# Altium PCB PCB2.0.PcbDoc
Units mil, origin at the board's own origin, x right, y up, seen from the top; angles counter-clockwise.
Board outline 1780 x 1290 mil, 2 copper layers (Top Layer, Bottom Layer); 31 components, 36 nets, 125 pads, 32 vias.
Unrouted connection lines stored in the file: 1.
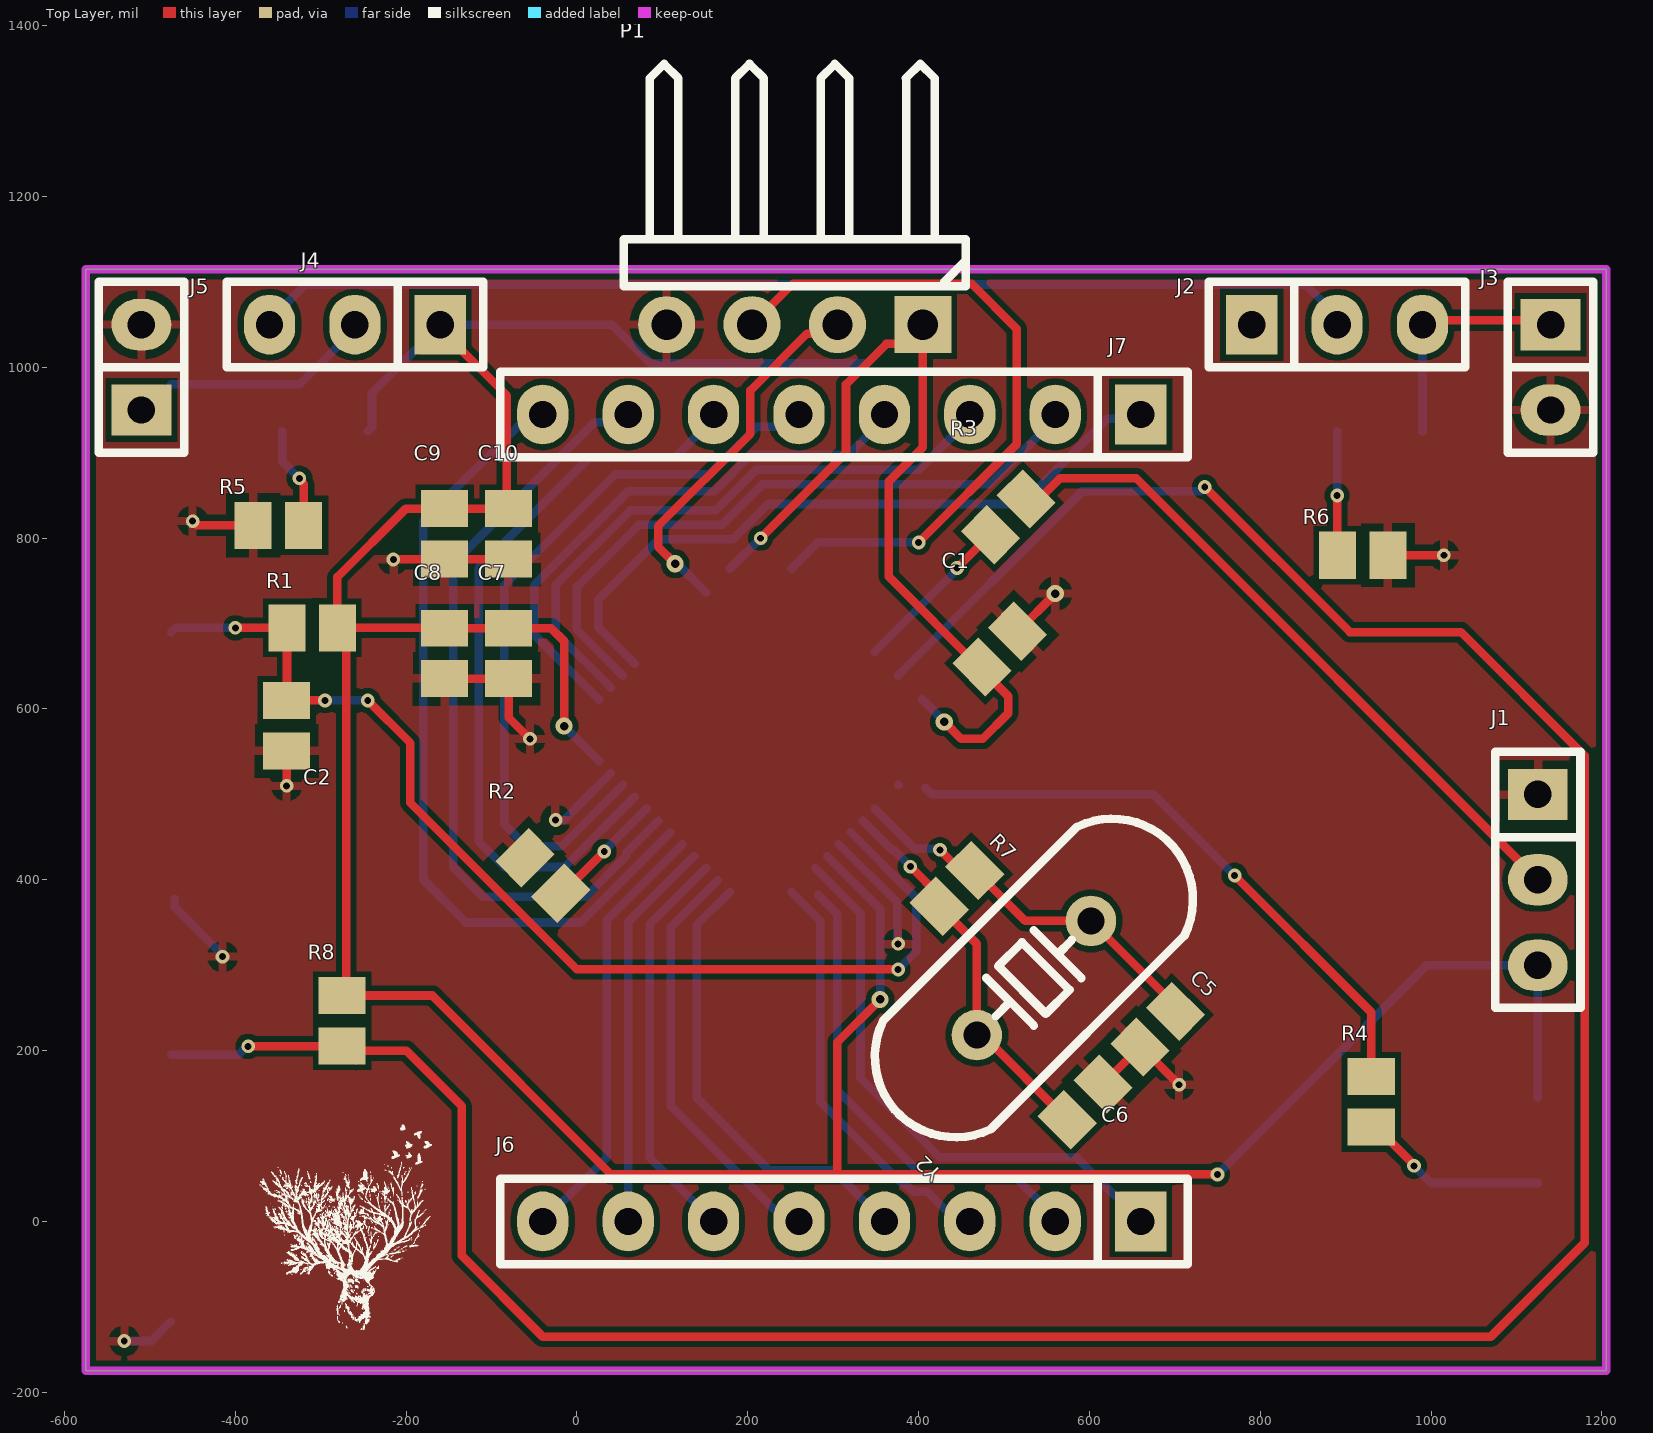
[diagram p0: Top Layer view]
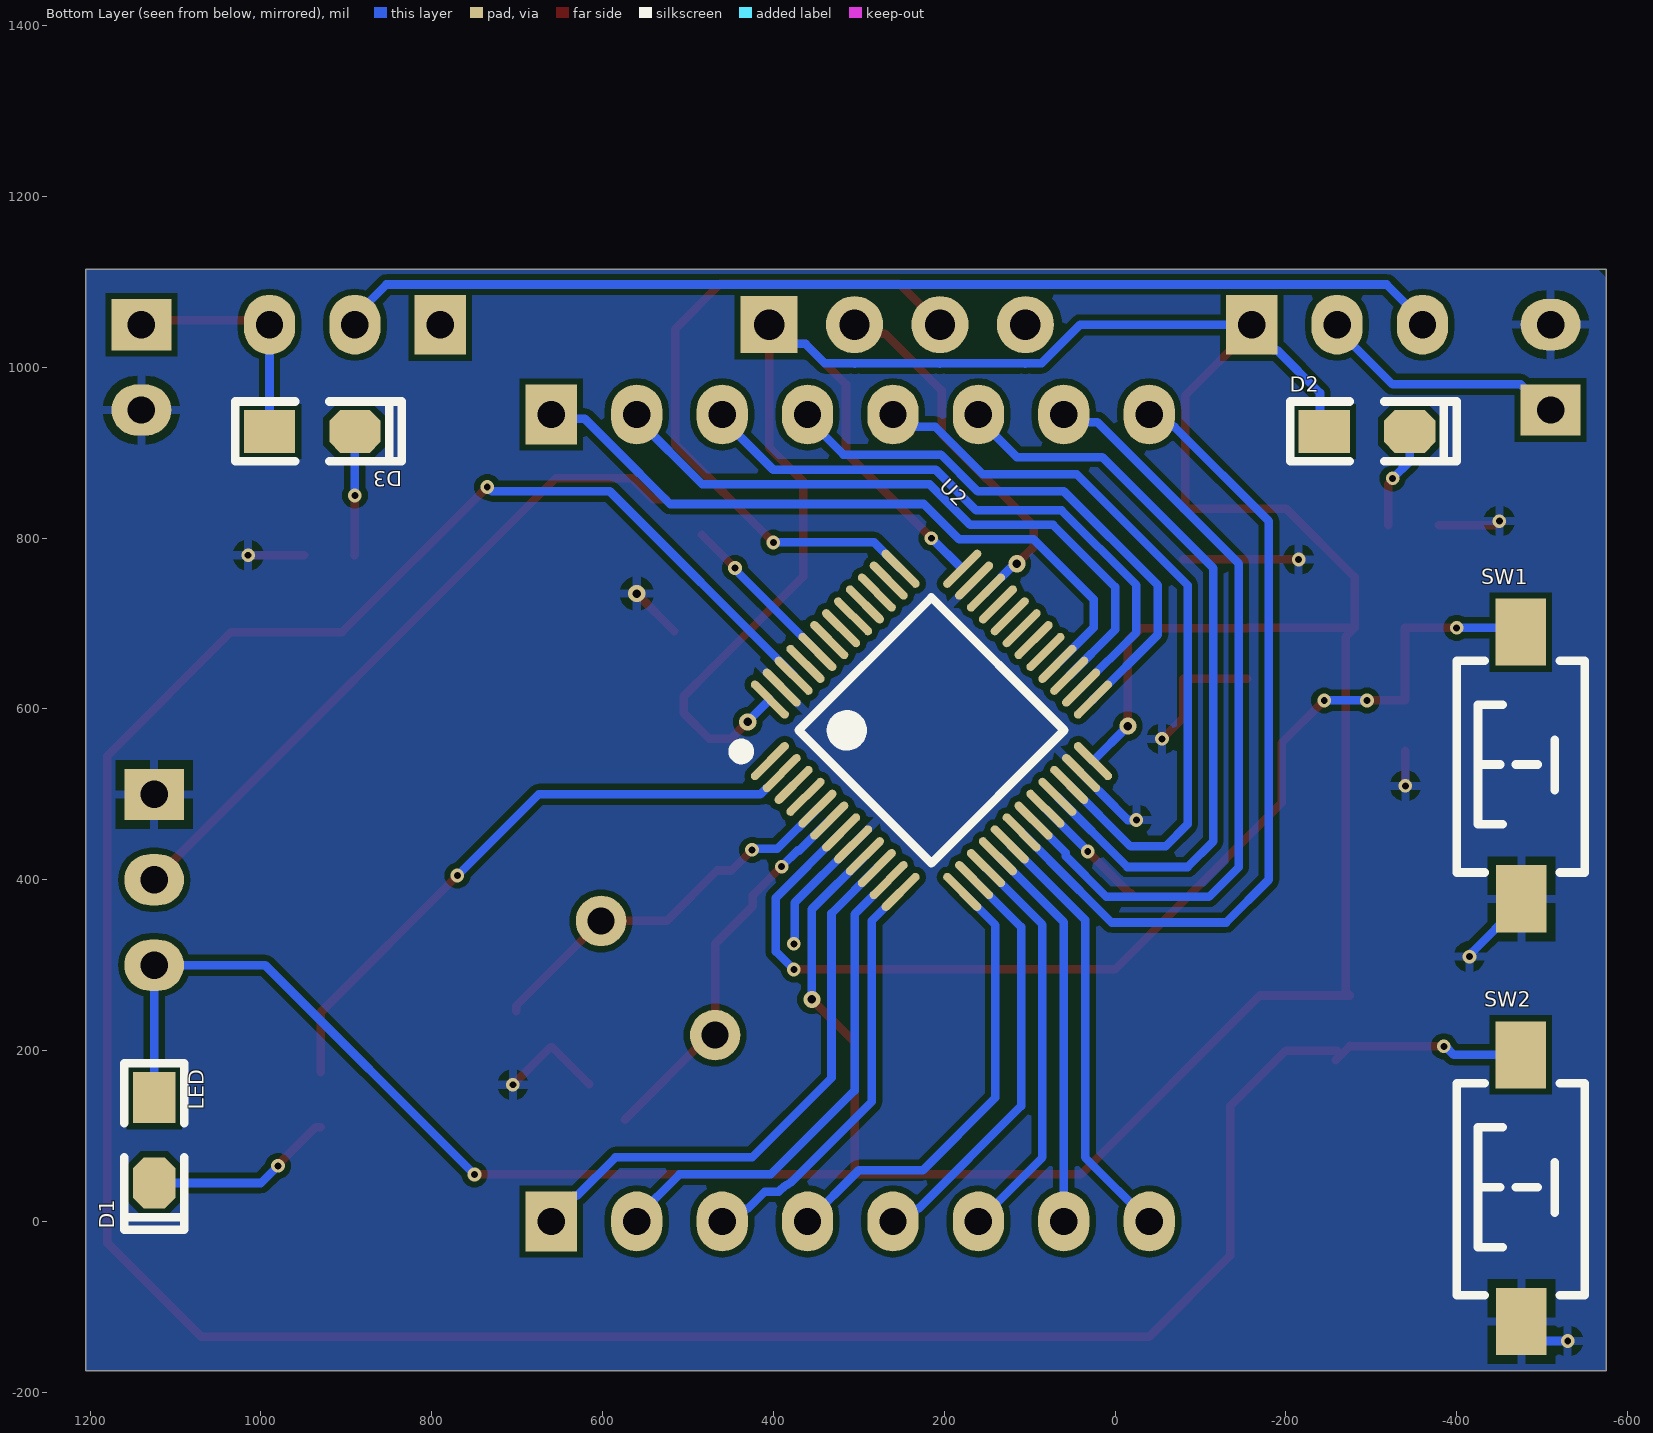
[diagram p1: Bottom Layer view, seen from below]

## Layer stack, top to bottom
Top Solder: solder mask 0.4, Solder Resist, Dk 3.5
Top Layer: signal copper 1.4
Dielectric 1: dielectric 12.6, FR-4, Dk 4.8
Bottom Layer: signal copper 1.4
Bottom Solder: solder mask 0.4, Solder Resist, Dk 3.5

## Board outline
-575,-175 -575,1115 1205,1115 1205,-175

## Design rules (kind name [scope] priority, off if disabled: settings)
Clearance [All] p1: gap=7 ignorepadtopadclearanceinfootprint=FALSE
ComponentClearance [All] p1: gap=0 collisioncheckmode=3 verticalgap=0 showdistances=TRUE
HoleToHoleClearance [All] p1: gap=2 allowstackedmicrovias=TRUE
MinimumSolderMaskSliver [All] p1: minsoldermaskwidth=0
PlaneConnect [All] p1: planeconnectstyle=Direct reliefexpansion=20 reliefentries=4 reliefconductorwidth=10 reliefairgap=10
PolygonConnect [All] p1: connectstyle=Relief reliefconductorwidth=10 reliefentries=4 polygonreliefangle="90 Angle" airgapwidth=10
RoutingVias [All] p1: holewidth=10 width=20 viastyle="Through Hole" minholewidth=1 minwidth=12 maxholewidth=13 maxwidth=27
SilkToSilkClearance [All] p1: silktosilkclearance=0
SilkToSolderMaskClearance [IsPad] p1: minsilkscreentomaskgap=0 clearancetoexposedcopper=TRUE
SolderMaskExpansion [All] p1: expansion=4 istentingtop=FALSE
Width [All] p1: maxlimit=30 minlimit=10 preferedwidth=10 minimp=50.000000 maximp=50.000000 favimp=50.000000
24 further rules are at their usual default settings.

## Classes and differential pairs
component class stm32最小系统: C1 C2 C5 C6 C7 C8 C9 C10 D1 D2 D3 J1 J2 J3 J4 J5 J6 J7 P1 R2 SW1 SW2 U2 Y2

## Components (designator, comment, footprint, x,y, rotation, side; value= is the part's Value field where it differs from the comment)
C1 "105 C0603" C0805 495,670 r225 top value=104
C2 "105 C0603" C0805 -340,580.47 r90 top value=104
C5 "22P,0603" C0805 680,225 r225 top value=104
C6 "22P,0603" C0805 595,140 r45 top value=104
C7 "105 C0603" C0805 -80,665 r90 top value=104
C8 "105 C0603" C0805 -155,665 r90 top value=104
C9 "105 C0603" C0805 -155,805 r90 top value=104
C10 "105 C0603" C0805 -80,805 r90 top value=104
D1 "LED" "LED 0805G" 1125,95 r270 bottom
D2 "LED" "LED 0805G" -295,925 r180 bottom
D3 "LED" "LED 0805G" 940,925 r180 bottom
J1 "Pin HDR1X3" "Pin HDR1X3/2.54mm-S" 1125,500 r0 top
J2 "充电开关" "Pin HDR1X3/2.54mm-S" 790,1050 r90 top
J3 "充电电源" Fe-HDR1X2/2.54-S 1140,1050 r270 top
J4 "开关" "Pin HDR1X3/2.54mm-S" -160,1050 r270 top
J5 "电池" Fe-HDR1X2/2.54-S -510,950 r90 top
J6 "Female HDR1X8" Fe-HDR1X8/2.54-S 660,0 r270 top locked
J7 "Female HDR1X8" Fe-HDR1X8/2.54-S 660,944.88 r270 top locked
P1 "SWD" HDR-1X4_H 405,1050 r180 top
R1 "10K R0603" C0805 -310,695 r0 top
R2 "10K R0603" C0805 -40,405 r315 top
R3 "10K R0603" C0805 505,825 r45 top
R4 "10K R0603" C0805 930,140 r90 top
R5 "10K R0603" C0805 -349.53,815 r180 top
R6 "10K R0603" C0805 920,780 r0 top
R7 "1M0603" C0805 445,390 r45 top
R8 "10K R0603" C0805 -275,235 r90 top
SW1 "SW-PB_V" "TSW SMD-3*6*2.5" -475,535 r90 bottom
SW2 "SW-PB_V" "TSW SMD-3*6*2.5" -475,40 r90 bottom
U2 "stm32f103c8t6_48pin" "TQFP48 7x7_L" 215,575 r225 bottom
Y2 "8M" "XTAL-49S DIP" 535,285 r45 top

## Footprints (in the part's own frame and the unit in brackets; to place one, negate y for a bottom-side part, rotate by r counter-clockwise, add the part's x,y. Pads: shape width x height; smd on the part's side, far side on the other; paste and mask are expansions set on the pad)
C0805 [mm] "Chip Capacitor, Body 2.0x1.3mm, IPC High Density"
  rect 1.1x1.4 smd: 1(-0.75,0) 2(0.75,0)
  body extent -1.1,-0.72 1.1,0.72, height 1.4
Fe-HDR1X2/2.54-S [mil] "Connector; Header; 2x2 Position"
  rect 60x70 hole 32: 1(0,0)
  oval 60x70 hole 32: 2(100,0)
  silkscreen extent -50,-50 150,50, body extent -55,-48 155,50, height 335
Fe-HDR1X8/2.54-S [mil]
  rect 70x60 hole 32: 1(0,0)
  oval 70x60 hole 32: 2(0,-100) 3(0,-200) 4(0,-300) 5(0,-400) 6(0,-500) 7(0,-600) 8(0,-700)
  silkscreen extent -50,-750 50,55, body extent -49,-755 49,55, height 126
HDR-1X4_H [mm] "弯脚排针，4脚"
  rect 1.7x1.7 hole 0.9: 1(0,0)
  round 1.7 hole 0.9: 2(2.54,0) 3(5.08,0) 4(7.62,0)
  silkscreen extent -1.27,-7.76 8.89,-1.14, body extent -1.27,-7.77 8.89,1.27, height 4.85
"LED 0805G" [mil] "绿色0805LED"
  rect 60x50 smd: 1(-50,0)
  oct 60x50 smd: 2(50,0)
  silkscreen extent -90,-35 105,35, body extent -39,-25 39,25, height 32
"Pin HDR1X3/2.54mm-S" [mil]
  rect 70x60 hole 32: 1(0,0)
  oval 70x60 hole 32: 2(0,-100) 3(0,-200)
  silkscreen extent -50,-250 50,50, body extent -50,-250 50,50, height 336
"TQFP48 7x7_L" [mm] "48脚，体宽：7x7mm, 脚距：0.5mm"
  oval 0.25x1.5 smd: 1(-2.75,-4.046) 2(-2.25,-4.046) 3(-1.75,-4.046) 4(-1.25,-4.046) 5(-0.75,-4.046) 6(-0.25,-4.046) 7(0.25,-4.046) 8(0.75,-4.046) 9(1.25,-4.046) 10(1.75,-4.046) 11(2.25,-4.046) 12(2.75,-4.046) 25(2.75,4.046) 26(2.25,4.046) 27(1.75,4.046) 28(1.25,4.046) 29(0.75,4.046) 30(0.25,4.046) 31(-0.25,4.046) 32(-0.75,4.046) 33(-1.25,4.046) 34(-1.75,4.046) 35(-2.25,4.046) 36(-2.75,4.046)
  oval 1.5x0.25 smd: 13(4.046,-2.75) 14(4.046,-2.25) 15(4.046,-1.75) 16(4.046,-1.25) 17(4.046,-0.75) 18(4.046,-0.25) 19(4.046,0.25) 20(4.046,0.75) 21(4.046,1.25) 22(4.046,1.75) 23(4.046,2.25) 24(4.046,2.75) 37(-4.046,2.75) 38(-4.046,2.25) 39(-4.046,1.75) 40(-4.046,1.25) 41(-4.046,0.75) 42(-4.046,0.25) 43(-4.046,-0.25) 44(-4.046,-0.75) 45(-4.046,-1.25) 46(-4.046,-1.75) 47(-4.046,-2.25) 48(-4.046,-2.75)
  silkscreen extent -3.68,-4.57 2.79,2.79, body extent -4.5,-4.5 4.5,4.5, height 1.05
"TSW SMD-3*6*2.5" [mm] "3*6*2.5mm"
  rect 2x1.5 smd: 1(-3.996,-0.02) 2(3.937,0)
  silkscreen extent -3.21,-1.9 3.09,1.9, body extent -4,-1.88 4,1.62, height 2.59
"XTAL-49S DIP" [mm]
  round 1.5 hole 0.8: 1(-2.4,0) 2(2.4,0)
  silkscreen extent -5.7,-2.28 5.7,2.28, body extent -5.68,-2.35 5.68,2.3, height 3.5

## Part data
C1 C2 C7 C8 C9 C10: library part Cap, LatestRevisionDate=17-Jul-2002, LatestRevisionNote="Re-released for DXP Platform.", Published=8-Jun-2000, Publisher="Altium Limited"
C5 C6: library part Cap, "Capacitor", LatestRevisionDate=17-Jul-2002, LatestRevisionNote="Re-released for DXP Platform.", Published=8-Jun-2000, Publisher="Altium Limited"
J2 J4: library part "Pin HDR1X3"
J3 J5: library part "Female HDR1X2"
P1: library part "Header 4", "Header, 4-Pin", LatestRevisionDate=17-Jul-2002, LatestRevisionNote="Re-released for DXP Platform.", Publisher="Altium Limited"
R1 R2 R3 R4 R5 R6 R8: library part Res2, LatestRevisionDate=17-Jul-2002, LatestRevisionNote="Re-released for DXP Platform.", Published=8-Jun-2000, Publisher="Altium Limited"
R7: library part Res2, "Resistor", LatestRevisionDate=17-Jul-2002, LatestRevisionNote="Re-released for DXP Platform.", Published=8-Jun-2000, Publisher="Altium Limited"
Y2: library part XTAL, "Crystal Oscillator", LatestRevisionDate=17-Jul-2002, LatestRevisionNote="Re-released for DXP Platform.", Published=8-Jun-2000, Publisher="Altium Limited"

## Via types
v1: diameter 16, hole 8, Top Layer to Bottom Layer, 27 vias
v2: diameter 20, hole 10, Top Layer to Bottom Layer, 5 vias

## Nets (pads, with @x,y where several pads share a name; then routed paths per layer and width w, separated by ;. In a path a pad name is that pad's centre, name@x,y a point inside that pad or via, vN(x,y) a via of type N, cw(c..) or ccw(c..) an arc to the next point about the centre after c; other vN are vias at no path point)
BOOT0: R3.1 U2.44 | length 193.5
  Top Layer w10: v1(445,765) R3.1
  Bottom Layer w10: U2.44 443.85,762.09 443.85,763.85 v1(445,765)
BOOT1: R2.2 U2.20 | length 141.9
  Top Layer w10: R2.2 -17.19,384.12 v1(31.84,433.16)
  Bottom Layer w10: v1(31.84,433.16) 31.84,433.6 U2.20
GND: C1.1 C2.1 C5.2 C6.2 C7.1 C8.1 C9.1 C10.1 J1.1 J3.2 J5.2 P1.4 R2.1 R5.2 R6.2 SW1.1 SW2.1 U2.8 U2.23 U2.35 U2.47 | length 1045.8
  Top Layer w10: v1(-450,820) -445,815 R5.2 ; v1(-340,510) C2.1 ; v1(-215,775) -214.53,775.47 C9.1 C10.1 ; C8.1 C7.1 -80,590 v1(-55,565) ; C1.1 v2(560,735) ; C6.2 C5.2 660.88,204.12 v1(705,160) ; R6.2 v1(1015,780)
  Bottom Layer w10: v1(-530,-140) -498.47,-140 SW2.1 ; SW1.1@-470.79,377.69 -470.79,367.84 -417.94,315 -417.94,314.57 -415,311.62 v1(-415,310) ; v1(-25,470) -15,470 0,485 -0.27,485 U2.23 ; U2.8 375,373.24 375,326 v1(376,325)
NetD1_2: D1.2 R4.1 | length 222.9
  Top Layer w10: R4.1 935.91,110.47 980,66.38 v1(980,65)
  Bottom Layer w10: v1(980,65) 1000,45 D1.2
NetD2_2: D2.2 R5.1 | length 120.4
  Top Layer w10: v1(-325,870) -325,868.38 -320,863.38 R5.1
  Bottom Layer w10: D2.2 -345,890 v1(-325,870)
NetD3_1: D3.1 J2.3 J3.1 | length 277.1
  Top Layer w10: J2.3@990,1055 1135,1055 J3.1
  Bottom Layer w10: D3.1 J2.3
NetD3_2: D3.2 R6.1 | length 145.2
  Top Layer w10: v1(890,850) 890,780.47 R6.1
  Bottom Layer w10: v1(890,850) D3.2
NetJ1_2: J1.2 R3.2 | length 803.8
  Top Layer w10: R3.2 541.19,845.88 565.31,870 655,870 J1.2
NetJ2_2: J2.2 J4.3 | length 1292.7
  Bottom Layer w10: J4.3 -360,1055 -318,1097 853,1097 890,1060 J2.2@890,1055
NetJ4_2: J4.2 J5.1 | length 294.4
  Bottom Layer w10: J5.1 -505,950 -475,980 -325,980 -260,1045 J4.2
OSCIN: C5.1 R7.2 U2.5 Y2.2 | length 454.7
  Top Layer w10: v1(425,435) 449.12,410.88 R7.2 524.95,351.81 Y2.2 700.88,252.75 C5.1
  Bottom Layer w10: U2.5 395.61,436.15 423.85,436.15 v1(425,435)
OSCOUT: C6.1 R7.1 U2.6 Y2.1 | length 454.5
  Top Layer w10: v1(390.39,415.39) 424.12,381.66 R7.1 468.19,325.05 Y2.1 475.05,218.19 C6.1
  Bottom Layer w10: U2.6 334.71,469.32 369.72,434.31 371.47,434.31 v1(390.39,415.39)
PA0: J6.1 U2.10 | length 668.1
  Bottom Layer w10: U2.10 332,360.56 332,168 425,75 585,75 630,30 635,30 660,5 J6.1
PA1: J6.2 U2.11 | length 559.9
  Bottom Layer w10: U2.11@282.34,382.38 305,359.73 305,153.28 403.28,55 510,55 560,5 J6.2
PA2: J6.3 U2.12 | length 492.1
  Bottom Layer w10: U2.12 285,351.89 285,140 350.2,74.8 379.39,45.61 cw(c360,5) 391.82,36.82 393.64,35 397.75,35 410,35 430.43,14.57 445.43,14.57 J6.3
PA3: J6.4 U2.13 | length 537
  Bottom Layer w10: U2.13 140,346.89 140,145 225,60 300,60 J6.4
PA4: J6.5 U2.14 | length 493.4
  Bottom Layer w10: U2.14 110,344.73 110,135 230.43,14.57 245.43,14.57 J6.5
PA5: J6.6 U2.15 | length 472.1
  Bottom Layer w10: U2.15 85,347.56 85,75 J6.6
PA6: J6.7 U2.16 | length 459.5
  Bottom Layer w10: J6.7 60,350.4 U2.16
PA7: J6.8 U2.17 | length 509.1
  Bottom Layer w10: J6.8 35,75 35,353.24 U2.17
PB0: J7.8 U2.18 | length 965.5
  Bottom Layer w10: J7.8 -54.57,930.32 -69.69,930.32 -180,820 -180,400 -130,350 4.04,350 77,422.96 77,423.08 U2.18
PB1: J7.7 U2.19 | length 926.6
  Bottom Layer w10: J7.7 50.98,935.86 20.86,935.86 -145,770 -145,415 -110,380 10,380 57.5,427.5 57.5,431.42 U2.19
PB9: R8.1 SW2.2 U2.46 | length 3550.8
  Top Layer w10: v1(-385,205) -275.47,205 R8.1 R8.1@-258.35,188.82 ; R8.1@-260,200 -200,200 -135,135 -135,-40 -40,-135 1070,-135 1180,-25 1180,545 1035,690 905,690 v1(735,860)
  Bottom Layer w10: SW2.2 -396.62,195 -386.62,205 v1(-385,205) ; U2.46 376.35,639.64 591.72,855 730,855 v1(735,860)
PB10: J7.6 U2.21 | length 901.5
  Bottom Layer w10: U2.21 -14.6,415 -85,415 -115,445 -115,765 15,895 115.12,895 160,939.88 J7.6
PB11: J7.5 U2.22 | length 888.4
  Bottom Layer w10: U2.22 -18.29,439.14 -59.14,439.14 -85,465 -85,745 45,875 155,875 210.31,930.32 245.43,930.32 J7.5@253.02,937.91 ; J7.5@255.52,935.41 260,939.88 J7.5
PB12: J7.4 U2.25 | length 661
  Bottom Layer w10: U2.25 -50,686.89 -50,745 60,855 160.96,855 203.84,897.88 318,897.88 360,939.88 J7.4
PB13: J7.3 U2.26 | length 717.5
  Bottom Layer w10: U2.26 -25,689.73 -25,745 62.51,832.51 162.51,832.51 210,880 400.12,880 460,939.88 J7.3
PB14: J7.2 U2.27 | length 772.9
  Bottom Layer w10: U2.27 0,692.56 0,743 72.51,815.51 169.56,815.51 217.04,863 483.12,863 560,939.88 J7.2
PB15: J7.1 U2.28 | length 817.8
  Bottom Layer w10: U2.28 25,695.4 25,728.33 95.19,798.51 182.4,798.51 223.89,840 520.93,840 590.41,909.48 620.86,939.93 655.05,939.93 J7.1
PC13: R4.2 U2.2 | length 701.6
  Top Layer w10: v1(770,405) 930,245 R4.2@930,174.53
  Bottom Layer w10: U2.2@407.67,507.71 415.39,500 675,500 v1(770,405)
PC14: U2.3 | length 0.1
  Bottom Layer w10: U2.3 U2.3@376.47,511.08
PC15: U2.4
RESET: C2.2 R1.1 SW1.2 U2.7 | length 1310.9
  Top Layer w10: v1(-400,695) R1.1 -339.53,610.47 C2.2 v1(-295,610) ; v1(-245,610) -195,560 -195,490 0,295 v1(376,295)
  Bottom Layer w10: SW1.2 -470,695 v1(-400,695) ; v1(-295,610) v1(-245,610) ; U2.7 397,379.08 397,316 v1(376,295)
SWDCLK: P1.3 U2.37 | length 811.2
  Top Layer w10: P1.3 253,1098 462,1098 515,1045 515,910 v1(400,795)
  Bottom Layer w10: U2.37 251.19,764.19 282,795 v1(400,795)
SWDIO: P1.2 U2.34 | length 439.9
  Top Layer w10: v2(115,770) 95,790 95,814.07 203,922.07 203,973 269.49,1039.49 294.49,1039.49 P1.2
  Bottom Layer w10: v2(115,770) 117.32,770 150.97,736.35 U2.34
VCC3V3: C1.2 C7.2 C8.2 C9.2 C10.2 D1.1 D2.1 J1.3 J4.1 P1.1 R1.2 R8.2 U2.9 U2.24 U2.36 U2.48 | length 5394
  Top Layer w10: J4.1 -160,1045 -82,967 -82,836.53 C10.2 C9.2 -200.47,834.53 -280.47,754.53 R1.2 ; v2(-15,580) -15,679.21 -30.32,694.53 C7.2 C8.2 -155.47,695 R1.2 ; v1(215,800) 315,900 315,980 362.39,1027.39 382.39,1027.39 P1.1 405,906.44 365,866.44 365,755 472.5,647.5 505,615 505,595 475,565 450,565 v2(430,585) ; v2(355,260) 305,210 305,55 ; v1(750,55) 305,55 ; J1.3@1120,300 J1.3 ; R1.2 -270,684.53 -270,269.53 R8.2 -169.53,264.53 40,55 305,55
  Bottom Layer w10: D2.1 -240,930 -240,970 -190,1020 -185,1020 -160,1045 J4.1 40.7,1050 82.77,1007.93 85.7,1005 98.52,1005 ccw(c105,1050) 111.48,1005 198.52,1005 ccw(c205,1050) 211.48,1005 298.52,1005 ccw(c305,1050) 311.48,1005 340,1005 362.39,1027.39 382.39,1027.39 P1.1 ; v2(-15,580) -15,579.73 U2.24 ; U2.36 214.73,800 v1(215,800) ; U2.9 355,365.4 v2(355,260) ; U2.48 430,585.27 v2(430,585) ; v1(750,55) 995,300 J1.3 D1.1
pads on no net: J2.1 U2.1 U2.29 U2.30 U2.31 U2.32 U2.33 U2.38 U2.39 U2.40 U2.41 U2.42 U2.43 U2.45

## Polygon pours and split planes (outlines as drawn)
GND on Bottom Layer "GND_L02_P000" (solid, pour order 0): 1205,1115 1205,-175 -575,-175 -575,1105 -565,1115
GND on Top Layer "GND_L01_P001" (solid, pour order 1): 1205,1115 1205,-175 -575,-175 -575,1105 -565,1115

## Keep-outs
Top Layer:
  lines w10: -570,1115 970,1115 1205,1115 1205,-175 -575,-175 -575,1115 -565,1115

## Silkscreen, mask and mechanical layers (free items; w line width, h text height)
Top Overlay:
  drawing of 11228 lines, arcs and shapes, not listed
Mechanical 1:
  the board outline again, w10